# Altium PCB Manea_ThCAD_PROIECT_PCB1.PcbDoc (part 2 of 2)
Units mm, origin at the board's own origin, x right, y up, seen from the top; angles counter-clockwise.
Board outline 230 x 140.5 mm, 2 copper layers (Top Layer, Bottom Layer); 49 components, 35 nets, 143 pads, 52 vias.
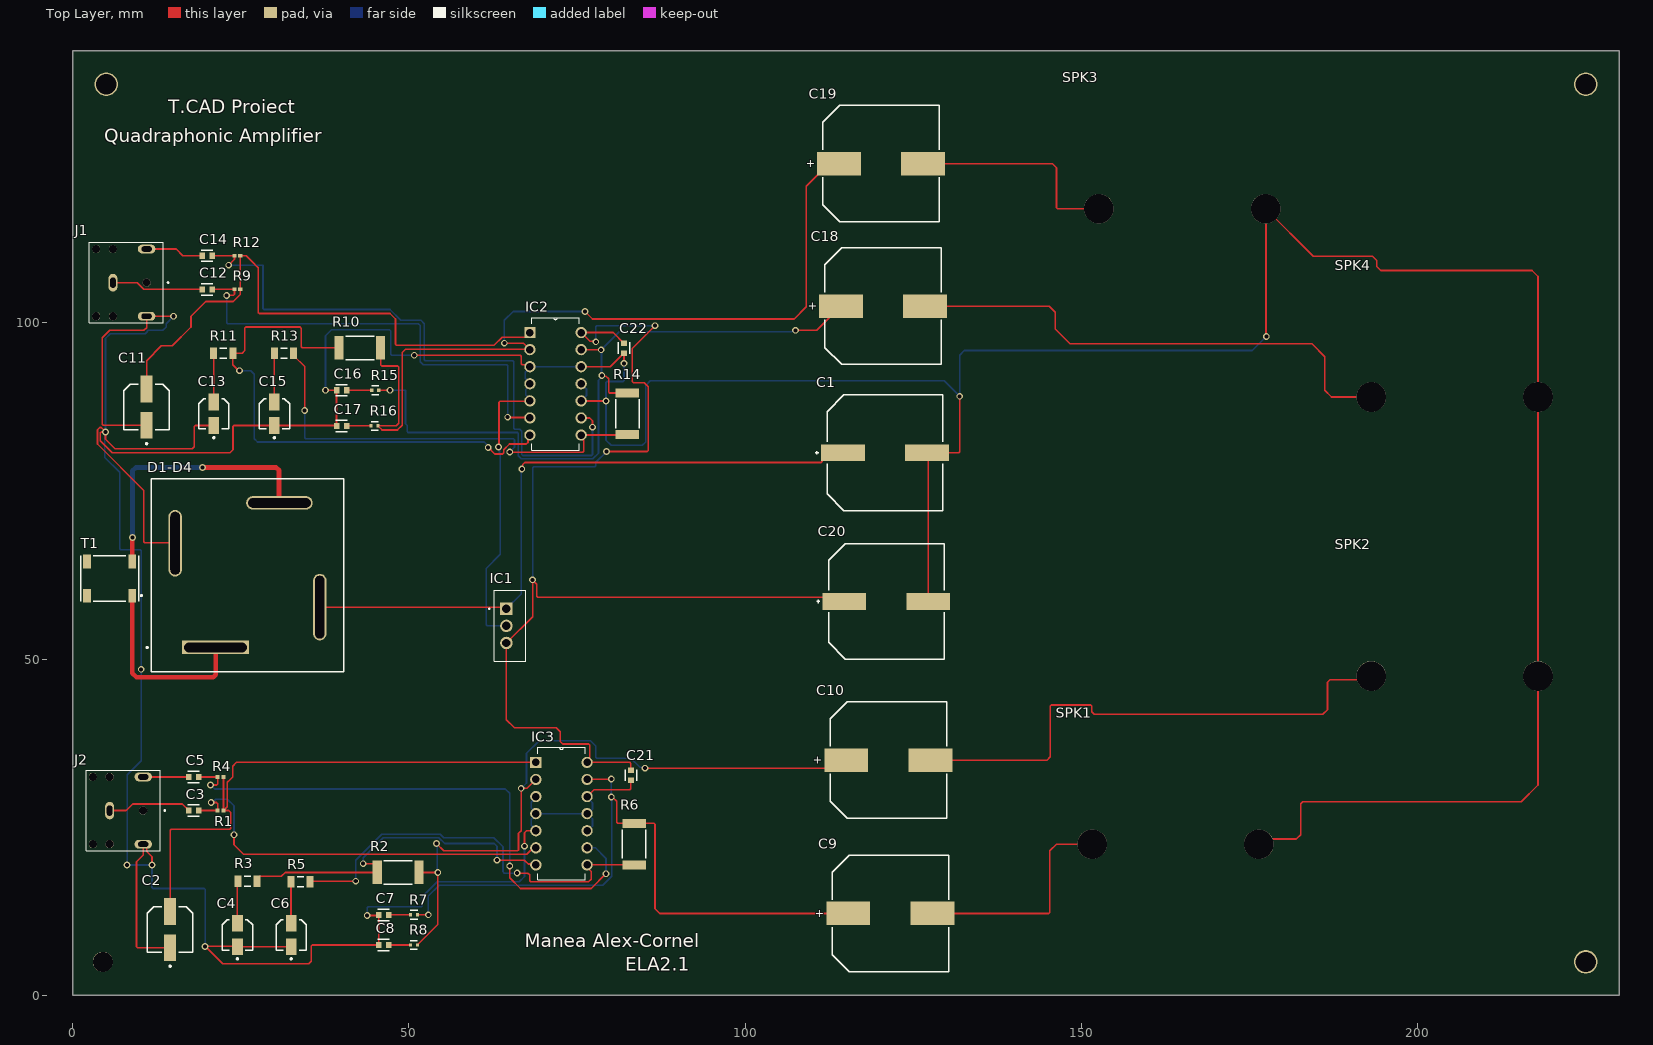
[diagram p0: Top Layer view]

## Part data (continued)
J1 J2: "3.5 mm, Stereo, Right Angle, Through Hole, Audio Jack Connector", Contact Resistance=50mΩ, Current Rating=1A, Insulation Resistance=100MΩ, Manufacturer="Same Sky", Max Operating Temperature=85°C, Min Operating Temperature=-25°C, Operating Force=29.42N, Voltage Rating=12V, Category="Audio / Video Connectors", ComponentLink1Description=https://datasheet.octopart.com:443/SJ1-3523N-Same-Sky-datasheet-188842965.pdf?src-supplier=Same+Sky, ComponentLink1URL=https://datasheet.octopart.com:443/SJ1-3523N-Same-Sky-datasheet-188842965.pdf?src-supplier=Same+Sky, ComponentLink2Description=https://datasheet.octopart.com:443/SJ1-3523N-Same-Sky-datasheet-181919365.pdf?src-supplier=Same+Sky, ComponentLink2URL=https://datasheet.octopart.com:443/SJ1-3523N-Same-Sky-datasheet-181919365.pdf?src-supplier=Same+Sky, ComponentLink3Description=https://datasheet.octopart.com:443/SJ1-3523N-Same-Sky-datasheet-181919366.pdf?src-supplier=Same+Sky, ComponentLink3URL=https://datasheet.octopart.com:443/SJ1-3523N-Same-Sky-datasheet-181919366.pdf?src-supplier=Same+Sky, ComponentLink4Description=https://datasheet.octopart.com:443/SJ1-3523N-CUI-Devices-datasheet-175925037.pdf?src-supplier=Same+Sky, ComponentLink4URL=https://datasheet.octopart.com:443/SJ1-3523N-CUI-Devices-datasheet-175925037.pdf?src-supplier=Same+Sky, ComponentLink5Description=https://datasheet.octopart.com:443/SJ1-3523N-CUI-Devices-datasheet-137944680.pdf?src-supplier=Same+Sky, ComponentLink5URL=https://datasheet.octopart.com:443/SJ1-3523N-CUI-Devices-datasheet-137944680.pdf?src-supplier=Same+Sky, ComponentLink6Description=https://datasheet.octopart.com:443/SJ1-3523N-CUI-Devices-datasheet-180438157.pdf?src-supplier=IHS, ComponentLink6URL=https://datasheet.octopart.com:443/SJ1-3523N-CUI-Devices-datasheet-180438157.pdf?src-supplier=IHS, ComponentLink7Description=https://datasheet.octopart.com:443/SJ1-3523N-Same-Sky-datasheet-190142061.pdf?src-supplier=element14+APAC, ComponentLink7URL=https://datasheet.octopart.com:443/SJ1-3523N-Same-Sky-datasheet-190142061.pdf?src-supplier=element14+APAC, ComponentLink8Description=https://datasheet.octopart.com:443/SJ1-3523N-Same-Sky-datasheet-182881325.pdf?src-supplier=Electro+Sonic, ComponentLink8URL=https://datasheet.octopart.com:443/SJ1-3523N-Same-Sky-datasheet-182881325.pdf?src-supplier=Electro+Sonic, ComponentLink9Description=https://datasheet.octopart.com:443/SJ1-3523N-CUI-Devices-datasheet-103114031.pdf?src-supplier=Master+Electronics, ComponentLink9URL=https://datasheet.octopart.com:443/SJ1-3523N-CUI-Devices-datasheet-103114031.pdf?src-supplier=Master+Electronics, ComponentLink10Description=https://datasheet.octopart.com:443/SJ1-3523N-Same-Sky-datasheet-189105612.pdf?src-supplier=Master+Electronics, ComponentLink10URL=https://datasheet.octopart.com:443/SJ1-3523N-Same-Sky-datasheet-189105612.pdf?src-supplier=Master+Electronics, ComponentLink11Description=https://datasheet.octopart.com:443/SJ1-3523N-Same-Sky-datasheet-182050170.pdf?src-supplier=Future+Electronics, ComponentLink11URL=https://datasheet.octopart.com:443/SJ1-3523N-Same-Sky-datasheet-182050170.pdf?src-supplier=Future+Electronics, ComponentLink12Description=https://datasheet.octopart.com:443/SJ1-3523N-CUI-Devices-datasheet-179174321.pdf?src-supplier=Future+Electronics, ComponentLink12URL=https://datasheet.octopart.com:443/SJ1-3523N-CUI-Devices-datasheet-179174321.pdf?src-supplier=Future+Electronics, ComponentLink13Description=https://datasheet.octopart.com:443/SJ1-3523N-CUI-Devices-datasheet-175923655.pdf?src-supplier=Future+Electronics, ComponentLink13URL=https://datasheet.octopart.com:443/SJ1-3523N-CUI-Devices-datasheet-175923655.pdf?src-supplier=Future+Electronics, ComponentLink14Description=https://datasheet.octopart.com:443/SJ1-3523N-CUI-Devices-datasheet-137916565.pdf?src-supplier=Future+Electronics, ComponentLink14URL=https://datasheet.octopart.com:443/SJ1-3523N-CUI-Devices-datasheet-137916565.pdf?src-supplier=Future+Electronics, ComponentLink15Description=https://datasheet.octopart.com:443/SJ1-3523N-CUI-Devices-datasheet-175927865.pdf?src-supplier=CUI+Devices+SCT, ComponentLink15URL=https://datasheet.octopart.com:443/SJ1-3523N-CUI-Devices-datasheet-175927865.pdf?src-supplier=CUI+Devices+SCT, ComponentLink16Description=https://datasheet.octopart.com:443/SJ1-3523N-CUI-Devices-datasheet-142371563.pdf?src-supplier=CUI+Devices+SCT, ComponentLink16URL=https://datasheet.octopart.com:443/SJ1-3523N-CUI-Devices-datasheet-142371563.pdf?src-supplier=CUI+Devices+SCT, ComponentLink17Description=https://octopart.com:443/opatz8j6/c1?t=gjuFzP5FeJ83X9cwTGu2sEmmwJClMyKvRq31tK1ghiwMfaJiNfVooFEWA3NKcPKyVTi3TopjWN7_jVNemsgZYLBGcTysez8j3ooErhfGEpaGvYXTm46f2XKwF5AUrG3oakeW1EITrY-RgczLpEkf621pOmzGdcrBuo_fTY8P93EKEICRE_pTxQzimOUyEadwLjpAytiZue2sdnG9_08Nr5BHHxjjNOe--5RGBswLz9oJptexyQGuRjBmjD9nyt9tPx4AxWVkug0cZeRbY05jbZASdtPt6-WktcXXJ7Li33icjQZem-hXhaL2R0u0Af73md00k_u0irKwzPj4eC0junqs0zkurYeIpEBCFnbg&src-supplier=Compliance+Statements, ComponentLink17URL=https://octopart.com:443/opatz8j6/c1?t=gjuFzP5FeJ83X9cwTGu2sEmmwJClMyKvRq31tK1ghiwMfaJiNfVooFEWA3NKcPKyVTi3TopjWN7_jVNemsgZYLBGcTysez8j3ooErhfGEpaGvYXTm46f2XKwF5AUrG3oakeW1EITrY-RgczLpEkf621pOmzGdcrBuo_fTY8P93EKEICRE_pTxQzimOUyEadwLjpAytiZue2sdnG9_08Nr5BHHxjjNOe--5RGBswLz9oJptexyQGuRjBmjD9nyt9tPx4AxWVkug0cZeRbY05jbZASdtPt6-WktcXXJ7Li33icjQZem-hXhaL2R0u0Af73md00k_u0irKwzPj4eC0junqs0zkurYeIpEBCFnbg&src-supplier=Compliance+Statements, ComponentLink18Description=https://octopart.com:443/opatz8j6/c1?t=FK_WB5MEeg8e3hchiUFLufnmrXjWfPns_31GAxOxSz5XCu7Mx54RJmU8oWMVHzsQDHhVfL6sbpf8_NglWXW47YlrGWvjCIcYCwBgGax26lgPQP7ePVnUIuxTSbRF0WS-6Nsk4c6CYYrZ3tinGlSI5arQThC3cXIqlveG9Ik5qLNagbrnaAXootczi_mrI3vsNqx9WMqOLxXIFI4-vrFzhJlVucQLREwoWmYqkSPYLuQ3--heFvxW44gPWJaFS9ZBQLJofzqBGReJxXS-DgOgjl2bCuYmuX6dX4q51Wsnv4hQ3w_hAUVVOW1quancvtOtLktylFp-nv9BlBEi-vqz9ne94H7vkARog4eX&src-supplier=Compliance+Statements, ComponentLink18URL=https://octopart.com:443/opatz8j6/c1?t=FK_WB5MEeg8e3hchiUFLufnmrXjWfPns_31GAxOxSz5XCu7Mx54RJmU8oWMVHzsQDHhVfL6sbpf8_NglWXW47YlrGWvjCIcYCwBgGax26lgPQP7ePVnUIuxTSbRF0WS-6Nsk4c6CYYrZ3tinGlSI5arQThC3cXIqlveG9Ik5qLNagbrnaAXootczi_mrI3vsNqx9WMqOLxXIFI4-vrFzhJlVucQLREwoWmYqkSPYLuQ3--heFvxW44gPWJaFS9ZBQLJofzqBGReJxXS-DgOgjl2bCuYmuX6dX4q51Wsnv4hQ3w_hAUVVOW1quancvtOtLktylFp-nv9BlBEi-vqz9ne94H7vkARog4eX&src-supplier=Compliance+Statements, ComponentLink19Description=https://octopart.com:443/opatz8j6/c1?t=UdIpGBcksFMbyudDRCHU_cM4VUqfRdaD9F0GIXHSdxGioLaqUbbj5soB0Lg_i9Le1gzib9ZjKQgBK4iE-j6DgrULbk6LjM663-xmUcWGM4Ya9FvNt2cmxcyNinrQ5ZBPyY5bu4RoQeVMp19Io0LziUfQXBaMG81yX2Qgy7rm_o7yZdT82mfh7U3A6q7SJxIqB7I7ZbQfC5CabIjoAbjznbQrH1ozzyaeiQXVL_6geplWzkdIi5w2dHDvFVp-IGUN90e2klKnP2A_Ai5F6BLf3IjGe8Zjo2r6t-LDgqKHNYw3iDHugYaVHNcStOHFhZFC-2WwucY-mGkN9-fcAqr1fA9RpMNns50&src-supplier=Compliance+Statements, ComponentLink19URL=https://octopart.com:443/opatz8j6/c1?t=UdIpGBcksFMbyudDRCHU_cM4VUqfRdaD9F0GIXHSdxGioLaqUbbj5soB0Lg_i9Le1gzib9ZjKQgBK4iE-j6DgrULbk6LjM663-xmUcWGM4Ya9FvNt2cmxcyNinrQ5ZBPyY5bu4RoQeVMp19Io0LziUfQXBaMG81yX2Qgy7rm_o7yZdT82mfh7U3A6q7SJxIqB7I7ZbQfC5CabIjoAbjznbQrH1ozzyaeiQXVL_6geplWzkdIi5w2dHDvFVp-IGUN90e2klKnP2A_Ai5F6BLf3IjGe8Zjo2r6t-LDgqKHNYw3iDHugYaVHNcStOHFhZFC-2WwucY-mGkN9-fcAqr1fA9RpMNns50&src-supplier=Compliance+Statements, ComponentLink20Description=https://octopart.com:443/opatz8j6/c1?t=pDg1b1pYhpzqU392vJ_Jb3HLHPPzL0sAM5iyDHTPCetBcv_Sp1d-hJNQ556zVr5CdDNtNnZDeT9UXiVgAY5S64M-JSURvz-uorpDhlHE8t-NqIP0C6funSUuJTALTwKEJ_63uBUFx6mOoaK7PcASKHZ5FUs2Eanv8BS0GHxdibUAf2RceAXHkxwb2tLftSdnLjUq3WIVWvGyaOXA152k5sLcWrVPe37TXyhtlruGxJ-oGWaHmv_rm21DomcvISw5LsSS6OYGOZPVpG2uGYGgsGXwC0kLCw0NRQ_8r5isbCv0nrOWO727JWoEjEl5igJPqhucFWm0rj7fGTRzHNPtvFZjRbxEkRX6NoLHgIlI&src-supplier=Compliance+Statements, ComponentLink20URL=https://octopart.com:443/opatz8j6/c1?t=pDg1b1pYhpzqU392vJ_Jb3HLHPPzL0sAM5iyDHTPCetBcv_Sp1d-hJNQ556zVr5CdDNtNnZDeT9UXiVgAY5S64M-JSURvz-uorpDhlHE8t-NqIP0C6funSUuJTALTwKEJ_63uBUFx6mOoaK7PcASKHZ5FUs2Eanv8BS0GHxdibUAf2RceAXHkxwb2tLftSdnLjUq3WIVWvGyaOXA152k5sLcWrVPe37TXyhtlruGxJ-oGWaHmv_rm21DomcvISw5LsSS6OYGOZPVpG2uGYGgsGXwC0kLCw0NRQ_8r5isbCv0nrOWO727JWoEjEl5igJPqhucFWm0rj7fGTRzHNPtvFZjRbxEkRX6NoLHgIlI&src-supplier=Compliance+Statements, ComponentLink21Description=https://octopart.com:443/opatz8j6/c1?t=7vmJb-KgeebzF6ID3bFFwvqYryya2RktZyo-G2sT8rG6SRJyz16kOmaQ2ou6ab3xMPo5npRScceIiW07oDQ1f5JfhRkWb9_Y_6rCSDi_uNFhA6f9GIb9pNI00QkWPpkHkPf6vGHxDv5mUr8xCnFeDJMGnT5pJSW73Anww1ZNZ5YNBfaYDFRkWL08Fvbhf9VcmV8pSucmne1PHtxIs5zkCCqmelimsIXrz0uwMxahLOjitLj_9e_e1AOmWQ-ZYvwc17tVkBLVsZjK0aJCdNSugvk6xn_3gwZvuZo6Vqs_B5XwRxnkJ_GY4dJySkj0Gh5tVNccPYw3GObpftcvwec0lfkUKHKNdrMy6Lc8&src-supplier=Compliance+Statements, ComponentLink21URL=https://octopart.com:443/opatz8j6/c1?t=7vmJb-KgeebzF6ID3bFFwvqYryya2RktZyo-G2sT8rG6SRJyz16kOmaQ2ou6ab3xMPo5npRScceIiW07oDQ1f5JfhRkWb9_Y_6rCSDi_uNFhA6f9GIb9pNI00QkWPpkHkPf6vGHxDv5mUr8xCnFeDJMGnT5pJSW73Anww1ZNZ5YNBfaYDFRkWL08Fvbhf9VcmV8pSucmne1PHtxIs5zkCCqmelimsIXrz0uwMxahLOjitLj_9e_e1AOmWQ-ZYvwc17tVkBLVsZjK0aJCdNSugvk6xn_3gwZvuZo6Vqs_B5XwRxnkJ_GY4dJySkj0Gh5tVNccPYw3GObpftcvwec0lfkUKHKNdrMy6Lc8&src-supplier=Compliance+Statements, ComponentLink22Description=https://octopart.com:443/opatz8j6/c1?t=Un2tl9Nj9bSvzM7IKxJOdyIGf7L8C2-5kvYpunEZrdGSfiMO37fbS_I13rKkj5ham76OVsj54G2v97kMRcXuqb_kSMGoGiy93NryKqHZFqa8OCzokOfsjonKJ12Uuy0YHRmbezol8y4EjYZmx0TMFsWAPZBqPbeTctZo3-o-Br2JroDvYQTJwDskX6QIshJSBSA9uFUYc2RGP2Ytj2OZERSo9sD3NXytpuLuZ8C65mZ-vr0hF3yAnYySSV9fn-2l-pztLjEEm120s6sy5-svJ-xc3PuN0oLaUwllU_tTQMlPAaspxnvPl1Gpyn9Wz4Y_A71_fe4q9m_M4dKufVtGvRSOa7MFhcE&src-supplier=Compliance+Statements, ComponentLink22URL=https://octopart.com:443/opatz8j6/c1?t=Un2tl9Nj9bSvzM7IKxJOdyIGf7L8C2-5kvYpunEZrdGSfiMO37fbS_I13rKkj5ham76OVsj54G2v97kMRcXuqb_kSMGoGiy93NryKqHZFqa8OCzokOfsjonKJ12Uuy0YHRmbezol8y4EjYZmx0TMFsWAPZBqPbeTctZo3-o-Br2JroDvYQTJwDskX6QIshJSBSA9uFUYc2RGP2Ytj2OZERSo9sD3NXytpuLuZ8C65mZ-vr0hF3yAnYySSV9fn-2l-pztLjEEm120s6sy5-svJ-xc3PuN0oLaUwllU_tTQMlPAaspxnvPl1Gpyn9Wz4Y_A71_fe4q9m_M4dKufVtGvRSOa7MFhcE&src-supplier=Compliance+Statements, Contact Gender=Female, Export Control Classification Number (ECCN) Code=EAR99, Harmonized Tariff Schedule (HTS) Code=8536.69.40.10, Introduction Date=2013-12-05, Lifecycle Status=Production, Manufacturer Part Number=SJ1-3523N, Mounting Technology="Through Hole", Number of Conductors=3, Number of Poles=3, Number of Ports=1, Pins=3, Pricing="186=0.5385, 280=0.5263, 560=0.521, 1120=0.5158, 2520=0.5106 (USD)", REACH SVHC=Yes, RoHS=Compliant, Shell Finish=Nickel, Shell Material=Brass, Shielding=Unshielded, Stock=4186, Supplier="Arrow Electronics", Supplier Part Number=SJ1-3523N
R1 R4 R9 R12: "Res Thick Film 0402 1M Ohm 1% 0.063W(1/16W) ±100ppm/C Pad SMD T/R", Case Code (Imperial)=0402, Manufacturer="Yageo Group", Max Operating Temperature=155°C, Min Operating Temperature=-55°C, Power Dissipation=62.5mW, Power Rating=63mW, Temperature Coefficient=100ppm/°C, Tolerance=1%, Voltage Rating=50V, Case Code (Metric)=0402, Case/Package=0402, Category="Chip SMD Resistors", China RoHS=Non-Compliant, ComponentLink1Description=https://datasheet.octopart.com:443/RC0402FR-071ML-Yageo-datasheet-175887523.pdf?src-supplier=Newark, ComponentLink1URL=https://datasheet.octopart.com:443/RC0402FR-071ML-Yageo-datasheet-175887523.pdf?src-supplier=Newark, ComponentLink2Description=https://datasheet.octopart.com:443/RC0402FR-071ML-Yageo-Group-datasheet-190305687.pdf?src-supplier=Newark, ComponentLink2URL=https://datasheet.octopart.com:443/RC0402FR-071ML-Yageo-Group-datasheet-190305687.pdf?src-supplier=Newark, ComponentLink3Description=https://datasheet.octopart.com:443/RC0402FR-071ML-Yageo-datasheet-8324527.pdf?src-supplier=Newark, ComponentLink3URL=https://datasheet.octopart.com:443/RC0402FR-071ML-Yageo-datasheet-8324527.pdf?src-supplier=Newark, ComponentLink4Description=https://datasheet.octopart.com:443/RC0402FR-071ML-Yageo-datasheet-12531192.pdf?src-supplier=Newark, ComponentLink4URL=https://datasheet.octopart.com:443/RC0402FR-071ML-Yageo-datasheet-12531192.pdf?src-supplier=Newark, ComponentLink5Description=https://datasheet.octopart.com:443/RC0402FR-071ML-Yageo-datasheet-141265859.pdf?src-supplier=Newark, ComponentLink5URL=https://datasheet.octopart.com:443/RC0402FR-071ML-Yageo-datasheet-141265859.pdf?src-supplier=Newark, ComponentLink6Description=https://datasheet.octopart.com:443/RC0402FR-071ML-Yageo-datasheet-103092701.pdf?src-supplier=Upverter, ComponentLink6URL=https://datasheet.octopart.com:443/RC0402FR-071ML-Yageo-datasheet-103092701.pdf?src-supplier=Upverter, ComponentLink7Description=https://datasheet.octopart.com:443/RC0402FR-071ML-Yageo---Phycomp-datasheet-98239111.pdf?src-supplier=Upverter, ComponentLink7URL=https://datasheet.octopart.com:443/RC0402FR-071ML-Yageo---Phycomp-datasheet-98239111.pdf?src-supplier=Upverter, ComponentLink8Description=https://datasheet.octopart.com:443/RC0402FR-071ML-Yageo-datasheet-10408619.pdf?src-supplier=element14+APAC, ComponentLink8URL=https://datasheet.octopart.com:443/RC0402FR-071ML-Yageo-datasheet-10408619.pdf?src-supplier=element14+APAC, ComponentLink9Description=https://datasheet.octopart.com:443/RC0402FR-071ML-Yageo-datasheet-62067350.pdf?src-supplier=Farnell, ComponentLink9URL=https://datasheet.octopart.com:443/RC0402FR-071ML-Yageo-datasheet-62067350.pdf?src-supplier=Farnell, ComponentLink10Description=https://datasheet.octopart.com:443/RC0402FR-071ML-Yageo-datasheet-8329306.pdf?src-supplier=element14, ComponentLink10URL=https://datasheet.octopart.com:443/RC0402FR-071ML-Yageo-datasheet-8329306.pdf?src-supplier=element14, ComponentLink11Description=https://datasheet.octopart.com:443/RC0402FR-071ML-Yageo-Group-datasheet-176638170.pdf?src-supplier=Future+Electronics, ComponentLink11URL=https://datasheet.octopart.com:443/RC0402FR-071ML-Yageo-Group-datasheet-176638170.pdf?src-supplier=Future+Electronics, ComponentLink12Description=https://datasheet.octopart.com:443/RC0402FR-071ML-Yageo-datasheet-164759695.pdf?src-supplier=Future+Electronics, ComponentLink12URL=https://datasheet.octopart.com:443/RC0402FR-071ML-Yageo-datasheet-164759695.pdf?src-supplier=Future+Electronics, ComponentLink13Description=https://datasheet.octopart.com:443/RC0402FR-071ML-Yageo-datasheet-137700087.pdf?src-supplier=Future+Electronics, ComponentLink13URL=https://datasheet.octopart.com:443/RC0402FR-071ML-Yageo-datasheet-137700087.pdf?src-supplier=Future+Electronics, ComponentLink14Description=https://datasheet.octopart.com:443/RC0402FR-071ML-Yageo-datasheet-8324255.pdf?src-supplier=Future+Electronics, ComponentLink14URL=https://datasheet.octopart.com:443/RC0402FR-071ML-Yageo-datasheet-8324255.pdf?src-supplier=Future+Electronics, ComponentLink15Description=https://datasheet.octopart.com:443/RC0402FR-071ML-Yageo-datasheet-175423674.pdf?src-supplier=SOS+electronic, ComponentLink15URL=https://datasheet.octopart.com:443/RC0402FR-071ML-Yageo-datasheet-175423674.pdf?src-supplier=SOS+electronic, ComponentLink16Description=https://datasheet.octopart.com:443/RC0402FR-071ML-Yageo-datasheet-148775077.pdf?src-supplier=TME, ComponentLink16URL=https://datasheet.octopart.com:443/RC0402FR-071ML-Yageo-datasheet-148775077.pdf?src-supplier=TME, ComponentLink17Description=https://datasheet.octopart.com/RC0402FR-071ML-Yageo-datasheet-73766026.pdf, ComponentLink17URL=https://datasheet.octopart.com/RC0402FR-071ML-Yageo-datasheet-73766026.pdf, ComponentLink18Description=http://sigma.octopart.com:80/conflict_mineral_statement/Yageo-company-3.pdf?src-supplier=Compliance+Statements, ComponentLink18URL=http://sigma.octopart.com:80/conflict_mineral_statement/Yageo-company-3.pdf?src-supplier=Compliance+Statements, ComponentLink19Description=http://sigma.octopart.com:80/rohs_statement/Yageo-company-2.pdf?src-supplier=Compliance+Statements, ComponentLink19URL=http://sigma.octopart.com:80/rohs_statement/Yageo-company-2.pdf?src-supplier=Compliance+Statements, Composition="Thick Film", Country of Origin="Mainland China, Taiwan", Depth=500µm, Export Control Classification Number (ECCN) Code=EAR99, Harmonized Tariff Schedule (HTS) Code=8533.21.00.30, Height=350µm, Introduction Date=2004-10-04, Lead Free="Lead Free", Length=1mm, Lifecycle Status=Production, Manufacturer Part Number=RC0402FR-071ML, Military Standard=Not, Mounting Technology="Surface Mount", Number of Terminals=2, Packaging="Tape & Reel", Pins=2, Pricing="10=10, 100=0.010, 500=0.010, 2500=0.010, 5000=0.010, 10000=0.010 (EUR)", REACH SVHC=Yes, RoHS=Compliant, Schedule B="8533210045, 8533210045|8533210045|8533210045|8533210045|8533210045|8533210045|8533210045|8533210045|8533210045|8533210045|8533210045|8533210045|8533210045|8533210045|8533210045|8533210045|8533210045|8533210045|8533210045|8533210045|8533210045|8533210045|8533210045|85", Stock=1403147, Supplier=Farnell, Supplier Part Number=RC0402FR-071ML, Termination=SMD/SMT, Voltage Rating (AC)=50V, Voltage Rating (DC)=50V, Width=500µm, Working Voltage=50V
R2 R6 R10 R14: "Res Thick Film 2512 100K Ohm 1% 2W ±100ppm/°C Pad SMD T/R Automotive AEC-Q200", Ambient Temperature Range High=70°C, Case/Package=2512, Manufacturer="TE Connectivity", Manufacturer Lifecycle Status=ACTIVE, Max Operating Temperature=155°C, Min Operating Temperature=-55°C, Operating Supply Voltage=500V, Power Dissipation=2W, Supplier Part Number=4-2176331-9, Temperature Coefficient=100ppm/°C, Tolerance=1%, Category="Chip SMD Resistors", China RoHS=Compliant, ComponentLink1Description=https://datasheet.octopart.com:443/CRGP2512F100K-TE-Connectivity-datasheet-156004650.pdf?src-supplier=Future+Electronics, ComponentLink1URL=https://datasheet.octopart.com:443/CRGP2512F100K-TE-Connectivity-datasheet-156004650.pdf?src-supplier=Future+Electronics, ComponentLink2Description=https://datasheet.octopart.com:443/CRGP2512F100K-TE-Connectivity-datasheet-114718804.pdf?src-supplier=JRH+Electronics, ComponentLink2URL=https://datasheet.octopart.com:443/CRGP2512F100K-TE-Connectivity-datasheet-114718804.pdf?src-supplier=JRH+Electronics, ComponentLink3Description=https://datasheet.octopart.com:443/CRGP2512F100K-TE-Connectivity-datasheet-138898427.pdf?src-supplier=Upverter, ComponentLink3URL=https://datasheet.octopart.com:443/CRGP2512F100K-TE-Connectivity-datasheet-138898427.pdf?src-supplier=Upverter, ComponentLink4Description=https://sigma.octopart.com:443/114728873/technical_drawing/TE-Connectivity-CRGP2512F100K.pdf?src-supplier=TE+Connectivity, ComponentLink4URL=https://sigma.octopart.com:443/114728873/technical_drawing/TE-Connectivity-CRGP2512F100K.pdf?src-supplier=TE+Connectivity, ComponentLink5Description=https://datasheet.octopart.com:443/4-2176331-9-TE-Connectivity---AMP-datasheet-184935180.pdf?src-supplier=Master+Electronics, ComponentLink5URL=https://datasheet.octopart.com:443/4-2176331-9-TE-Connectivity---AMP-datasheet-184935180.pdf?src-supplier=Master+Electronics, ComponentLink6Description=https://datasheet.octopart.com:443/4-2176331-9-TE-Connectivity-datasheet-176339768.pdf?src-supplier=Sager+Electronics, ComponentLink6URL=https://datasheet.octopart.com:443/4-2176331-9-TE-Connectivity-datasheet-176339768.pdf?src-supplier=Sager+Electronics, Composition="Thick Film", Export Control Classification Number (ECCN) Code=EAR99, Harmonized Tariff Schedule (HTS) Code=8533.21.00.30, Height=550µm, Introduction Date=2018-03-13, Length=6.35mm, Lifecycle Status=Production, Manufacturer Part Number=CRGP2512F100K, Mounting Technology="Surface Mount", Number of Terminals=2, Packaging="Cut Tape", Power Rating=2W, Pricing="4000=0.11838, 80000=0.11064, 160000=0.10311, 400000=0.09689, 800000=0.09638 (USD)", REACH SVHC=Yes, RoHS=Compliant, Stock=4000, Supplier=Avnet, Voltage Rating=500V, Voltage Rating (DC)=500V, Width=3.2mm, Working Voltage=500V
R3 R5 R11 R13: "250mW Thick Film Resistors 200V ±100ppm/℃ ±1% 1kΩ 1206 Chip Resistor - Surface Mount ROHS", Case Code (Imperial)=1206, Case Code (Metric)=3216, Manufacturer="Yageo Group", Max Operating Temperature=155°C, Min Operating Temperature=-55°C, Power Dissipation=250mW, Temperature Coefficient=100ppm/°C, Tolerance=1%, Voltage Rating=200V, Case/Package=1206, Category="Chip SMD Resistors", China RoHS=Non-Compliant, ComponentLink1Description=https://datasheet.octopart.com:443/RC1206FR-071KL-Yageo-datasheet-175887523.pdf?src-supplier=Newark, ComponentLink1URL=https://datasheet.octopart.com:443/RC1206FR-071KL-Yageo-datasheet-175887523.pdf?src-supplier=Newark, ComponentLink2Description=https://datasheet.octopart.com:443/RC1206FR-071KL-Yageo-datasheet-103092701.pdf?src-supplier=Upverter, ComponentLink2URL=https://datasheet.octopart.com:443/RC1206FR-071KL-Yageo-datasheet-103092701.pdf?src-supplier=Upverter, ComponentLink3Description=https://datasheet.octopart.com:443/RC1206FR-071KL-Yageo-datasheet-98239111.pdf?src-supplier=Upverter, ComponentLink3URL=https://datasheet.octopart.com:443/RC1206FR-071KL-Yageo-datasheet-98239111.pdf?src-supplier=Upverter, ComponentLink4Description=https://datasheet.octopart.com:443/RC1206FR-071KL-Yageo-datasheet-8359522.pdf?src-supplier=element14+APAC, ComponentLink4URL=https://datasheet.octopart.com:443/RC1206FR-071KL-Yageo-datasheet-8359522.pdf?src-supplier=element14+APAC, ComponentLink5Description=https://datasheet.octopart.com:443/RC1206FR-071KL-Yageo-datasheet-13032847.pdf?src-supplier=element14+APAC, ComponentLink5URL=https://datasheet.octopart.com:443/RC1206FR-071KL-Yageo-datasheet-13032847.pdf?src-supplier=element14+APAC, ComponentLink6Description=https://datasheet.octopart.com:443/RC1206FR-071KL-Yageo-datasheet-62067350.pdf?src-supplier=Farnell, ComponentLink6URL=https://datasheet.octopart.com:443/RC1206FR-071KL-Yageo-datasheet-62067350.pdf?src-supplier=Farnell, ComponentLink7Description=https://datasheet.octopart.com:443/RC1206FR-071KL-Yageo-Group-datasheet-176638170.pdf?src-supplier=Future+Electronics, ComponentLink7URL=https://datasheet.octopart.com:443/RC1206FR-071KL-Yageo-Group-datasheet-176638170.pdf?src-supplier=Future+Electronics, ComponentLink8Description=https://datasheet.octopart.com:443/RC1206FR-071KL-Yageo-datasheet-164759695.pdf?src-supplier=Future+Electronics, ComponentLink8URL=https://datasheet.octopart.com:443/RC1206FR-071KL-Yageo-datasheet-164759695.pdf?src-supplier=Future+Electronics, ComponentLink9Description=https://datasheet.octopart.com:443/RC1206FR-071KL-Yageo-datasheet-137700087.pdf?src-supplier=Future+Electronics, ComponentLink9URL=https://datasheet.octopart.com:443/RC1206FR-071KL-Yageo-datasheet-137700087.pdf?src-supplier=Future+Electronics, ComponentLink10Description=https://datasheet.octopart.com:443/RC1206FR-071KL-Yageo-datasheet-27233761.pdf?src-supplier=Future+Electronics, ComponentLink10URL=https://datasheet.octopart.com:443/RC1206FR-071KL-Yageo-datasheet-27233761.pdf?src-supplier=Future+Electronics, ComponentLink11Description=https://datasheet.octopart.com:443/RC1206FR-071KL-Yageo-datasheet-8324387.pdf?src-supplier=Future+Electronics, ComponentLink11URL=https://datasheet.octopart.com:443/RC1206FR-071KL-Yageo-datasheet-8324387.pdf?src-supplier=Future+Electronics, ComponentLink12Description=https://datasheet.octopart.com:443/RC1206FR-071KL-Yageo-datasheet-79472498.pdf?src-supplier=Megastar, ComponentLink12URL=https://datasheet.octopart.com:443/RC1206FR-071KL-Yageo-datasheet-79472498.pdf?src-supplier=Megastar, ComponentLink13Description=https://datasheet.octopart.com/RC1206FR-071KL-Yageo-datasheet-73766026.pdf, ComponentLink13URL=https://datasheet.octopart.com/RC1206FR-071KL-Yageo-datasheet-73766026.pdf, ComponentLink14Description=https://datasheet.octopart.com:443/RC1206FR-071KL-Yageo-datasheet-118639.pdf?src-supplier=DigiKey, ComponentLink14URL=https://datasheet.octopart.com:443/RC1206FR-071KL-Yageo-datasheet-118639.pdf?src-supplier=DigiKey, ComponentLink15Description=http://sigma.octopart.com:80/conflict_mineral_statement/Yageo-company-3.pdf?src-supplier=Compliance+Statements, ComponentLink15URL=http://sigma.octopart.com:80/conflict_mineral_statement/Yageo-company-3.pdf?src-supplier=Compliance+Statements, ComponentLink16Description=http://sigma.octopart.com:80/rohs_statement/Yageo-company-2.pdf?src-supplier=Compliance+Statements, ComponentLink16URL=http://sigma.octopart.com:80/rohs_statement/Yageo-company-2.pdf?src-supplier=Compliance+Statements, Composition="Thick Film", Country of Origin="Mainland China, Taiwan", Depth=1.6mm, Export Control Classification Number (ECCN) Code=EAR99, Harmonized Tariff Schedule (HTS) Code=8533.21.00.30, Height=550µm, Introduction Date=2008-07-18, Lead Free="Lead Free", Length=3.1mm, Lifecycle Status=Production, Manufacturer Part Number=RC1206FR-071KL, Military Standard=Not, Mounting Technology="Surface Mount", Number of Terminals=2, Packaging="Tape & Reel", Pins=2, Power Rating=250mW, Pricing="500=500, 1000=0.05, 2500=0.05 (EUR)", REACH SVHC=Yes, RoHS=Compliant, Schedule B="8533210045, 8533210045|8533210045, 8533210045|8533210045|8533210045, 8533210045|8533210045|8533210045|8533210045", Stock=132012, Supplier=Farnell, Supplier Part Number=RC1206FR-071KL, Termination=SMD/SMT, Voltage Rating (AC)=200V, Voltage Rating (DC)=200V, Width=1.6mm, Working Voltage=200V
R7 R8 R15 R16: "CR0402 FIXED RESISTOR 0402 (1005Metric) Chip Resistor ±5% -250/ +500ppm/C 2.7Ohm 0.063W 1/16W", Case Code (Imperial)=0402, Case Code (Metric)=1005, Manufacturer=Bourns, Max Operating Temperature=155°C, Max Power Dissipation=63mW, Min Operating Temperature=-55°C, Power Rating=62.5mW, Supplier Part Number=CR0402-J/-2R7GLFDKR-ND, Temperature Coefficient=500ppm/°C, Tolerance=5%, Voltage Rating=50V, Case/Package=0402, Category="Chip SMD Resistors", China RoHS=Non-Compliant, ComponentLink1Description=https://datasheet.octopart.com:443/CR0402-J--2R7GLF-Bourns-datasheet-159578630.pdf?src-supplier=IHS, ComponentLink1URL=https://datasheet.octopart.com:443/CR0402-J--2R7GLF-Bourns-datasheet-159578630.pdf?src-supplier=IHS, ComponentLink2Description=https://datasheet.octopart.com:443/CR0402-J--2R7GLF-Bourns-datasheet-181955239.pdf?src-supplier=IHS, ComponentLink2URL=https://datasheet.octopart.com:443/CR0402-J--2R7GLF-Bourns-datasheet-181955239.pdf?src-supplier=IHS, ComponentLink3Description=https://datasheet.octopart.com:443/CR0402-J--2R7GLF-Bourns-datasheet-68301632.pdf?src-supplier=Electro+Sonic, ComponentLink3URL=https://datasheet.octopart.com:443/CR0402-J--2R7GLF-Bourns-datasheet-68301632.pdf?src-supplier=Electro+Sonic, ComponentLink4Description=https://datasheet.octopart.com/CR0402-J/-2R7GLF-Bourns-datasheet-8723995.pdf, ComponentLink4URL=https://datasheet.octopart.com/CR0402-J/-2R7GLF-Bourns-datasheet-8723995.pdf, ComponentLink5Description=http://sigma.octopart.com:80/conflict_mineral_statement/Bourns-company-36.pdf?src-supplier=Compliance+Statements, ComponentLink5URL=http://sigma.octopart.com:80/conflict_mineral_statement/Bourns-company-36.pdf?src-supplier=Compliance+Statements, Composition="Thick Film", Contact Plating=Tin, Country of Origin=Taiwan, Depth=500µm, Export Control Classification Number (ECCN) Code=EAR99, Harmonized Tariff Schedule (HTS) Code=8533.21.00.30, Height=320µm, Introduction Date=2003-04-07, Length=1mm, Lifecycle Status=Production, Manufacturer Part Number=CR0402-J/-2R7GLF, Military Standard=Not, Mounting Technology="Surface Mount", Number of Terminals=2, Power Dissipation=63mW, Pricing="1=0.1, 10=0.02, 25=0.0144, 50=0.0114, 100=0.0091, 250=0.00696, 500=0.00574, 1000=0.0048, 5000=0.00333 (USD)", Radiation Hardening=No, REACH SVHC=Yes, RoHS=Compliant, Supplier=DigiKey, Termination=SMD/SMT, Width=500µm, Working Voltage=50V
SPK1 SPK2 SPK3 SPK4: "Speakers & Transducers 28mm SPEAKER w/ENCL 2 W 8 OHM 82 DB", Manufacturer="PUI Audio", Max Power Dissipation=3W, Power Rating=2W, Self Resonant Frequency=22Hz, Supplier Part Number=668-1431-ND, Cable Length=150mm, Category=Speakers, ComponentLink1Description=https://datasheet.octopart.com:443/ASE02808MR-LW150-R-PUI-Audio-datasheet-128089182.pdf?src-supplier=JRH+Electronics, ComponentLink1URL=https://datasheet.octopart.com:443/ASE02808MR-LW150-R-PUI-Audio-datasheet-128089182.pdf?src-supplier=JRH+Electronics, ComponentLink2Description=https://datasheet.octopart.com:443/ASE02808MR-LW150-R-PUI-Audio-datasheet-128089185.pdf?src-supplier=Sager+Electronics, ComponentLink2URL=https://datasheet.octopart.com:443/ASE02808MR-LW150-R-PUI-Audio-datasheet-128089185.pdf?src-supplier=Sager+Electronics, Height=14.8mm, Impedance=8Ω, Length=31mm, Manufacturer Part Number=ASE02808MR-LW150-R, Mounting Technology=Flanges, Pricing="1=7.56, 10=5.802, 42=4.95976, 84=4.60714, 126=4.41524, 252=4.10972, 504=3.83006, 1008=3.65106 (USD)", REACH SVHC=Yes, RoHS=Compliant, Shape="Rectangular, Square", Stock=2641, Supplier=DigiKey, Termination="Wire Leads", Width=28mm
T1: "Pulse Transformer 1: 1 1500VDC 0.6Ohm Prim. DCR 0.6Ohm Sec. DCR 6 Terminal SMD Automotive", Case/Package=SMD/SMT, DC Resistance (DCR)=600mΩ, Isolation Voltage=1500Vrms, Manufacturer="Yageo Group", Max Operating Temperature=130°C, Min Operating Temperature=-40°C, Category=Transformers, ComponentLink1Description=https://datasheet.octopart.com:443/PE-68386NL-Pulse-datasheet-155502643.pdf?src-supplier=Upverter, ComponentLink1URL=https://datasheet.octopart.com:443/PE-68386NL-Pulse-datasheet-155502643.pdf?src-supplier=Upverter, ComponentLink2Description=https://datasheet.octopart.com:443/PE-68386NL-Pulse-datasheet-151940171.pdf?src-supplier=IHS, ComponentLink2URL=https://datasheet.octopart.com:443/PE-68386NL-Pulse-datasheet-151940171.pdf?src-supplier=IHS, ComponentLink3Description=https://datasheet.octopart.com:443/PE-68386NL-Pulse-datasheet-134530794.pdf?src-supplier=ODG+(Origin+Data+Global), ComponentLink3URL=https://datasheet.octopart.com:443/PE-68386NL-Pulse-datasheet-134530794.pdf?src-supplier=ODG+(Origin+Data+Global), ComponentLink4Description=https://datasheet.octopart.com:443/PE-68386NL-Pulse-datasheet-8399838.pdf?src-supplier=Factory+Futures, ComponentLink4URL=https://datasheet.octopart.com:443/PE-68386NL-Pulse-datasheet-8399838.pdf?src-supplier=Factory+Futures, ComponentLink5Description=https://datasheet.octopart.com:443/PE-68386NL-Pulse-datasheet-145346898.pdf?src-supplier=Future+Electronics, ComponentLink5URL=https://datasheet.octopart.com:443/PE-68386NL-Pulse-datasheet-145346898.pdf?src-supplier=Future+Electronics, ComponentLink6Description=http://sigma.octopart.com:80/conflict_mineral_statement/Yageo-company-3.pdf?src-supplier=Compliance+Statements, ComponentLink6URL=http://sigma.octopart.com:80/conflict_mineral_statement/Yageo-company-3.pdf?src-supplier=Compliance+Statements, ComponentLink7Description=http://sigma.octopart.com:80/rohs_statement/Yageo-company-2.pdf?src-supplier=Compliance+Statements, ComponentLink7URL=http://sigma.octopart.com:80/rohs_statement/Yageo-company-2.pdf?src-supplier=Compliance+Statements, Country of Origin="Mainland China", Depth=8.64mm, Export Control Classification Number (ECCN) Code=EAR99, Height=2.5mm, Introduction Date=1998-06-30, Length=8.6mm, Lifecycle Status=Production, Manufacturer Part Number=PE-68386NL, Mounting Technology="Surface Mount", Number of Circuits=1, Pins=6, Pricing="1=1, 10=8.84, 25=8.53, 50=7.92, 100=7.32, 500=7.16 (EUR)", Radiation Hardening=No, REACH SVHC=Yes, RoHS=Compliant, Schedule B="8504500000, 8504500000|8504500000, 8504500000|8504500000|8504500000, 8504500000|8504500000|8504500000|8504500000", Shielding=Unshielded, Stock=604, Supplier=Farnell, Supplier Part Number=PE-68386NL, Termination=SMD/SMT, Turns Ratio=1:1, Width=6.7mm

## Free pads (board coordinates)
  round 3 hole 3 mask+0.1: 15(4.5,5)
  round 3.5 hole 3 mask+0.1: 15(5,135.5) 15(225,5) 15(225,135.5)

## Via types
v1: diameter 1, hole 0.6, Top Layer to Bottom Layer, tented top, 52 vias

## Nets (pads, with @x,y where several pads share a name; then routed paths per layer and width w, separated by ;. In a path a pad name is that pad's centre, name@x,y a point inside that pad or via, vN(x,y) a via of type N, cw(c..) or ccw(c..) an arc to the next point about the centre after c; other vN are vias at no path point)
"12V 1A 1": D1-D4.1 T1.1 | length 28.5
  Top Layer w0.7: T1.1 8.865,47.935 9.5,47.3 20.89,47.3 21.3,47.71 21.3,51.7 D1-D4.1
"12V 1A 2": D1-D4.4 T1.3 | length 40.5
  Top Layer w0.7: T1.3 v1@8.865,68.1 ; v1(19.3,78.5) 30.29,78.5 30.7,78.09 30.7,73.3 D1-D4.4
  Bottom Layer w0.7: v1(8.9,68.1) 8.9,78 9.4,78.5 v1(19.3,78.5)
GND: C1.1 C2.1 C4.1 C6.1 C7.2 C8.2 C11.1 C13.1 C15.1 C16.2 C17.2 C20.1 C21.1 C22.1 D1-D4.3 IC1.2 IC2.3 IC2.4 IC2.5 IC2.10 IC2.11 IC2.12 IC3.3 IC3.4 IC3.5 IC3.10 IC3.11 IC3.12 J1.2 J2.2 SPK1.1 SPK2.1 SPK3.1 SPK4.1 | length 850.8
  Top Layer w0.25: C11.1 4.546,84.8 4.4,84.946 4.4,97.8 5.5,98.9 10.6,98.9 11,99.3 J1.2 v1(15,101) ; v1(11.8,19.4) 11.8,20.637 11.029,21.408 11.029,22.011 10.54,22.5 J2.2 10.5,20.9 9.5,19.9 9.5,7.246 9.646,7.1 C2.1 ; D1-D4.3 15.2,67.3 10.746,67.3 10.6,67.446 10.6,75.1 3.7,82 3.7,84.1 4.046,84.446 4.254,84.446 v1(4.9,83.8) ; C13.1 18.246,84.75 18.1,84.604 18.1,81.6 17.8,81.3 6.3,81.3 4.9,82.7 v1(4.9,83.8) ; C6.1 C4.1 24.45,7.3 v1(19.7,7.3) 22.3,4.7 35.1,4.7 35.5,5.1 35.5,7.354 35.646,7.5 C8.2 C7.2 45.4,11.9 v1(43.8,11.9) ; v1(37.6,90) C16.2 C17.2 39.2,84.75 C15.1 23.996,84.75 23.85,84.604 23.85,81.15 23.4,80.7 5.9,80.7 4.1,82.5 4.1,83.654 4.246,83.8 v1(4.9,83.8) ; v1(50.8,95.2) 66.554,95.2 66.7,95.054 66.7,93.919 66.846,93.773 67.727,93.773 IC2.3 ; v1(63.341,81.551) 63.4,81.61 63.4,88.2 63.56,88.36 67.94,88.36 IC2.5 ; v1(67.2,22.2) 67.2,24.2 67.5,24.5 IC3.5 ; IC2.10 75.63,88.41 79.29,88.41 v1(79.3,88.4) ; IC2.12 79.95,93.5 81.95,95.5 C22.1 v1(82,94) ; IC3.12 77.52,30.6 82.854,30.6 83,30.746 C21.1 ; C20.1 127.25,80.5 C1.1 131.754,80.7 131.9,80.846 v1(131.9,89.1) ; SPK1.1 177.171,23.271 181.971,23.271 182.6,23.9 182.6,28.5 182.9,28.8 215.4,28.8 217.9,31.3 SPK2.1 SPK4.1 217.9,106.9 217,107.8 194.5,107.8 193.9,108.4 193.9,109.3 193.3,109.9 184.5,109.9 SPK3.1@177.45,116.95 ; SPK3.1 SPK3.1@177.45,116.95 ; v1(177.5,98) 177.45,98.05 SPK3.1@177.45,116.95
  Bottom Layer w0.25: v1(15,101) 13.9,99.9 13.9,99.4 13.4,98.9 11.246,98.9 11.1,98.754 11.1,98.7 10.8,98.4 5.6,98.4 4.9,97.7 v1(4.9,83.8) 4.8,83.7 4.8,80 7,77.8 7,66.446 7.146,66.3 10.054,66.3 10.2,66.154 v1(10.2,48.5) 10.2,34.9 8.1,32.8 v1(8.1,19.4) v1(11.8,19.4) 11.8,16.046 11.946,15.9 19.554,15.9 19.7,15.754 v1(19.7,7.3) ; v1(37.6,90) 37.6,98.1 38.5,99 47.1,99 47.3,98.8 47.3,95.346 47.446,95.2 v1(50.8,95.2) ; v1(43.8,11.9) 43.8,13.054 43.946,13.2 51.854,13.2 52,13.346 52,14.7 54.2,16.9 66.4,16.9 67.2,17.7 v1(67.2,22.2) ; v1(63.341,81.551) 63.475,81.417 63.475,80.676 63.6,80.551 63.6,65.6 61.5,63.5 61.5,55.106 61.646,54.96 IC1.2 ; IC2.5 68,88.68 67.4,89.28 67.4,90.1 68,90.7 IC2.4 68,91.069 67.3,91.769 67.3,92.691 68,93.391 IC2.3 IC2.12 ; IC3.5 68.88,24.649 68.2,25.329 68.2,26.211 68.88,26.891 IC3.4 ; IC3.3 68.88,29.431 68.2,28.751 68.2,27.869 68.88,27.189 IC3.4 ; IC2.10 76.4,89.2 76.4,90.18 IC2.11 ; IC3.10 76.591,24.5 77.3,25.209 77.3,26.24 IC3.11@76.57,26.97 ; IC3.12 76.5,29.464 77.3,28.664 77.3,27.7 76.64,27.04 IC3.11 IC3.4 ; v1(82,94) 82,91.446 81.854,91.3 79.446,91.3 79.3,91.154 v1(79.3,88.4) 79.3,82.6 80.1,81.8 84.7,81.8 85.2,82.3 85.2,90.7 85.9,91.4 129.6,91.4 v1(131.9,89.1) 131.9,95.2 132.6,95.9 175.4,95.9 v1(177.5,98)
NetC1_2: C1.2 D1-D4.2 IC1.1 | length 98.7
  Top Layer w0.25: D1-D4.2 64.25,57.75 IC1.1 ; v1(66.8,78.3) 66.944,78.444 66.944,78.959 67.249,79.265 111.279,79.265 111.425,79.411 111.425,79.575 112.55,80.7 C1.2
  Bottom Layer w0.25: IC1.1 66.7,59.7 66.7,78.2 v1(66.8,78.3)
NetC2_2: C2.2 IC3.1 R1.2 R4.2 | length 82.2
  Top Layer w0.25: C2.2 14.5,24.554 14.646,24.7 23.354,24.7 23.5,24.846 23.5,27.2 23.2,27.5 22.45,27.5 23,28.05 23,31.7 23.5,32.2 23.8,32.5 23.8,34.1 24.36,34.66 IC3.1 ; R1.2 R4.2
NetC3_1: C3.1 J2.1 | length 12.6
  Top Layer w0.25: J2.1 7.959,27.5 8.934,28.475 16.325,28.475 17.25,27.55 C3.1
NetC3_2: C3.2 IC3.6 R1.1 | length 60.6
  Top Layer w0.25: C3.2 R1.1 21.575,28.525 21.4,28.7 v1(20.6,28.7) ; v1(24,23.9) 24,22.4 25.4,21 67.534,21 68.494,21.96 IC3.6
  Bottom Layer w0.25: v1(20.6,28.7) 20.803,28.7 21.303,29.2 23,29.2 24,28.2 v1(24,23.9)
NetC4_2: C4.2 R3.1 | length 6.3
  Top Layer w0.25: C4.2 24.5,16.925 R3.1
NetC5_1: C5.1 J2.3 | length 6.8
  Top Layer w0.25: J2.3 C5.1
NetC5_2: C5.2 IC3.9 R4.1 | length 84.2
  Top Layer w0.25: C5.2 R4.1 21.575,31.446 21.429,31.3 v1(20.5,31.3) ; v1(65,19.25) 65,17.5 66.6,15.9 77.1,15.9 v1(79.3,18.1)
  Bottom Layer w0.25: v1(20.5,31.3) 20.537,31.3 21.137,30.7 64.354,30.7 65,30.054 v1(65,19.25) ; IC3.9 77.74,21.96 79.3,20.4 v1(79.3,18.1)
NetC6_2: C6.2 R5.1 | length 6.2
  Top Layer w0.25: R5.1 32.475,10.775 C6.2
NetC7_1: C7.1 R7.2 | length 3.2
  Top Layer w0.25: C7.1 R7.2
NetC8_1: C8.1 R8.2 | length 3.2
  Top Layer w0.25: C8.1 R8.2
NetC9_1: C9.1 IC3.13 R6.2 R7.1 | length 102.7
  Top Layer w0.25: R7.1 v1(52.9,12) ; IC3.13 76.54,32.16 80.06,32.16 v1(80.1,32.2) ; v1(80.1,29.5) 80.286,29.5 80.9,28.886 80.9,25.746 81.046,25.6 83.498,25.6 R6.2 86.454,25.602 86.6,25.456 86.6,12.9 87.3,12.2 C9.1
  Bottom Layer w0.25: v1(52.9,12) 52.9,14.8 54.5,16.4 78.837,16.4 80.175,17.738 80.175,29.425 v1(80.1,29.5) ; v1@80.1,29.454 v1(80.1,29.5) ; v1(80.1,32.2) v1(80.1,29.5)
NetC9_2: C9.2 SPK1.2 | length 33.4
  Top Layer w0.25: C9.2 145.154,12.2 145.3,12.346 145.3,21.5 146.3,22.5 SPK1.2
NetC10_1: C10.1 IC3.2 R2.2 R8.1 | length 101
  Top Layer w0.25: R8.1 51.262,7.512 54.3,10.55 v1(54.3,18.3) R2.2 ; v1(54.1,22.6) 55.2,21.5 66.154,21.5 66.3,21.646 66.3,24.1 66.7,24.5 v1(66.7,30.8) 67.56,30.8 IC3.2 ; v1(85.1,33.8) 113.85,33.8 C10.1
  Bottom Layer w0.25: v1(54.1,22.6) 54.2,22.5 54.2,18.4 v1(54.3,18.3) ; v1(66.7,30.8) 67.5,31.6 67.5,36 69.4,37.9 77,37.9 77.8,37.1 77.8,35.446 77.946,35.3 83,35.3 84.356,33.944 84.956,33.944 v1(85.1,33.8)
NetC10_2: C10.2 SPK2.2 | length 79.2
  Top Layer w0.25: C10.2 144.9,35 145.375,35.475 145.375,43.054 145.521,43.2 151.379,43.2 151.525,43.054 151.525,42.175 151.9,41.8 185.9,41.8 186.6,42.5 186.6,46.6 186.971,46.971 192.571,46.971 SPK2.2
NetC11_2: C11.2 IC2.1 R9.2 R12.2 | length 84.4
  Top Layer w0.25: C11.2 11,94.4 13.2,96.6 14.8,96.6 17.6,99.4 17.6,101 19.8,103.2 23.9,103.2 24.925,104.225 R9.2 R12.2 25.837,110 27.1,108.737 27.1,108.7 27.6,108.2 27.6,101.546 27.746,101.4 47.2,101.4 48,100.6 48,96.846 48.146,96.7 62.663,96.7 63.863,97.9 67.32,97.9 IC2.1
NetC12_1: C12.1 J1.1 | length 13.7
  Top Layer w0.25: J1.1 9.621,106 10.596,105.025 19.225,105.025 C12.1
NetC12_2: C12.2 IC2.6 R9.1 | length 68
  Top Layer w0.25: C12.2 R9.1 24.075,104.25 23.929,104.104 22.904,104.104 v1(22.9,104.1) ; v1(64.7,86) 64.76,85.94 67.94,85.94 IC2.6
  Bottom Layer w0.25: v1(22.9,104.1) 22.9,100.046 23.046,99.9 51.4,99.9 51.675,99.625 51.675,94.246 52.121,93.8 64.554,93.8 64.7,93.654 v1(64.7,86)
NetC13_2: C13.2 R11.1 | length 7.3
  Top Layer w0.25: R11.1 21,95.475 C13.2
NetC14_1: C14.1 J1.3 | length 8.7
  Top Layer w0.25: J1.3 15.4,111 16.4,110 C14.1
NetC14_2: C14.2 IC2.9 R12.1 | length 92.6
  Top Layer w0.25: C14.2 R12.1 24.075,109.475 v1(23.2,108.6) ; IC2.9 76.874,85.88 77.3,85.454 v1(77.3,84.5)
  Bottom Layer w0.25: v1(23.2,108.6) 28.316,108.6 28.316,102.146 28.462,102 47.2,102 48.8,100.4 51.8,100.4 52.3,99.9 52.3,94.546 52.446,94.4 65.454,94.4 65.6,94.254 65.6,84.356 65.746,84.21 66.49,84.21 66.787,83.913 66.787,80.446 66.933,80.3 77.154,80.3 77.3,80.446 v1(77.3,84.5)
NetC15_2: C15.2 R13.1 | length 7.2
  Top Layer w0.25: C15.2 R13.1
NetC16_1: C16.1 R15.2 | length 3.7
  Top Layer w0.25: C16.1 R15.2
NetC17_1: C17.1 R16.2 | length 3.6
  Top Layer w0.25: C17.1 R16.2
NetC18_1: C18.1 IC2.13 R14.2 R15.1 | length 105.6
  Top Layer w0.25: R15.1 v1(47.2,90) ; IC2.13 75.64,96.02 78.58,96.02 v1(78.6,96) ; v1(78.7,92.2) 78.819,92.081 79.319,92.081 79.7,91.7 79.7,89.746 79.846,89.6 R14.2 R14.2 ; v1(107.5,98.9) 110.65,98.9 C18.1
  Bottom Layer w0.25: v1(47.2,90) 49.5,90 49.5,85 49.737,84.763 49.737,83.856 49.883,83.71 66.14,83.71 66.287,83.563 66.287,80.239 66.726,79.8 77.361,79.8 78.2,80.639 78.2,91.497 78.7,91.997 v1(78.7,92.2) 78.65,92.25 78.65,95.95 v1(78.6,96) 81.3,98.7 106.979,98.7 107.035,98.756 107.356,98.756 v1(107.5,98.9)
NetC18_2: C18.2 SPK4.2 | length 76.3
  Top Layer w0.25: C18.2 145.2,102.5 146.1,101.6 146.1,99.1 148.3,96.9 184.3,96.9 186.2,95 186.2,90 187.2,89 SPK4.2
NetC19_1: C19.1 IC2.2 R10.2 R16.1 | length 129.5
  Top Layer w0.25: R10.2 45.802,93.746 45.948,93.6 48.354,93.6 48.5,93.454 48.5,85.1 48.1,84.7 R16.1 45.412,84.688 46,84.1 48.3,84.1 49,84.8 49,95.6 49.5,96.1 IC2.2@67.94,96.1 ; v1(64.2,97) 67.04,97 IC2.2@67.94,96.1 ; IC2.2 IC2.2@67.94,96.1 ; v1(76.2,101.7) 77.3,100.6 107.3,100.6 109.1,102.4 109.1,120.35 109.325,120.575 112.45,123.7 C19.1
  Bottom Layer w0.25: v1(64.2,97) 64.2,100.4 65.5,101.7 v1(76.2,101.7)
NetC19_2: C19.2 SPK3.2 | length 32.4
  Top Layer w0.25: C19.2 145.7,123.7 146.3,123.1 146.3,117.146 146.446,117 SPK3.2
NetC20_2: C20.2 C21.2 C22.2 IC1.3 IC2.14 IC3.14 | length 174.3
  Top Layer w0.25: v1(68.4,61.8) v1@68.4,61.763 ; v1(77.8,97.2) 77.725,97.275 76.925,97.275 IC2.14 80.37,98.58 81.95,97 C22.2 ; v1(79.4,80.9) 85.454,80.9 85.6,81.046 85.6,90.5 85,91.1 83.4,91.1 83.2,91.3 83.2,96.2 v1(86.6,99.6) ; C21.2 83,34.5 82.84,34.66 IC3.14 76.5,35.046 76.9,35.446 76.9,37.254 76.754,37.4 73.4,37.4 73.397,37.403 72.868,37.403 72.5,37.771 72.5,39.2 71.9,39.8 65.7,39.8 64.5,41 IC1.3 68.4,56.32 v1@68.4,61.763 ; C20.2 114.15,59.2 69.146,59.2 69,59.346 69,61.163 v1@68.4,61.763
  Bottom Layer w0.25: v1(68.4,61.8) 68.4,78.454 68.546,78.6 77.654,78.6 77.8,78.746 77.8,79.3 v1(79.4,80.9) ; v1(77.8,97.2) 77.8,99.454 77.946,99.6 v1(86.6,99.6)
NetIC2_7: IC2.7 R10.1 R11.2 | length 81.3
  Top Layer w0.25: v1(24.8,92.9) 24.7,92.9 23.825,93.775 R11.2 25.2,95.5 25.6,95.9 25.6,99.254 25.746,99.4 33.8,99.4 34,99.2 34,96.446 34.146,96.3 R10.1 ; v1(61.8,81.5) 62.775,80.525 63.962,80.525 64.125,80.688 64.125,81.162 64.963,82 67.454,82 67.727,82.274 67.727,83.067 IC2.7
  Bottom Layer w0.25: v1(24.8,92.9) 26.5,92.9 27,92.4 27,82.8 27.5,82.3 61.186,82.3 61.8,81.686 v1(61.8,81.5)
NetIC2_8: IC2.8 R13.2 R14.1 | length 67.2
  Top Layer w0.25: R13.2 32.85,95.175 34.5,93.525 v1(34.5,87) ; v1(65,80.8) 75.851,80.8 75.998,80.946 75.998,82.576 75.62,82.954 IC2.8 82.442,83.34 R14.1
  Bottom Layer w0.25: v1(34.5,87) 34.5,82.946 34.646,82.8 65.554,82.8 65.7,82.654 65.7,81.5 v1(65,80.8)
NetIC3_7: IC3.7 R2.1 R3.2 | length 52.4
  Top Layer w0.25: R3.2 27.425,17.325 27.825,17.725 31.025,17.725 31.6,18.3 R2.1 45.298,19.05 44.748,19.6 v1(43.2,19.6) ; v1(63.1,20.125) 67.175,20.125 67.74,19.56 68.74,19.56 IC3.7
  Bottom Layer w0.25: v1(43.2,19.6) 43.2,20.475 46.2,23.475 54.462,23.475 55.337,22.6 62.7,22.6 63.1,22.2 v1(63.1,20.125)
NetIC3_8: IC3.8 R5.2 R6.1 | length 61.7
  Top Layer w0.25: R5.2 35.425,17 v1(42.1,17) ; v1(66.1,18.2) 67.7,18.2 67.954,17.946 67.954,17.046 68.1,16.9 76.7,16.9 77.1,17.3 77.1,18.434 76.5,19.034 IC3.8 83.478,19.42 R6.1
  Bottom Layer w0.25: v1(42.1,17) 42.1,20.1 45.975,23.975 54.67,23.975 55.17,23.475 62.625,23.475 64,22.1 64,18.4 64.2,18.2 v1(66.1,18.2)
pads on no net: J1. J2. T1.4 T1.6

## Silkscreen, mask and mechanical layers (free items; w line width, h text height)
Top Overlay:
  text "T.CAD Proiect" at 14.2,131.2 h2
  text "Quadraphonic Amplifier" at 4.7,126.866 h2
  text "Manea Alex-Cornel" at 67.2,7.2 h2
  text "ELA2.1" at 82.2,3.7 h2
Mechanical 1:
  lines w0.1: 229,0 229,0

## Text inside footprints (layer, text, board x,y; h text height)
C9: Top Overlay "+" at 111.8,12.7 h1.22 r180
C10: Top Overlay "+" at 111.5,35.5 h1.22 r180
C18: Top Overlay "+" at 110.7,103 h1.22 r180
C19: Top Overlay "+" at 110.4,124.2 h1.22 r180
J1: Top 3D Body "PCB EDGE" at 2.75,99 h0.81 r270
J2: Top 3D Body "PCB EDGE" at 2.25,20.5 h0.81 r270